# Altium PCB project_6.PcbDoc
Units mm, origin at the board's own origin, x right, y up, seen from the top; angles counter-clockwise.
Board outline 72.69 x 47.42 mm, 2 copper layers (Top Layer, Bottom Layer); 86 components, 65 nets, 283 pads, 74 vias.
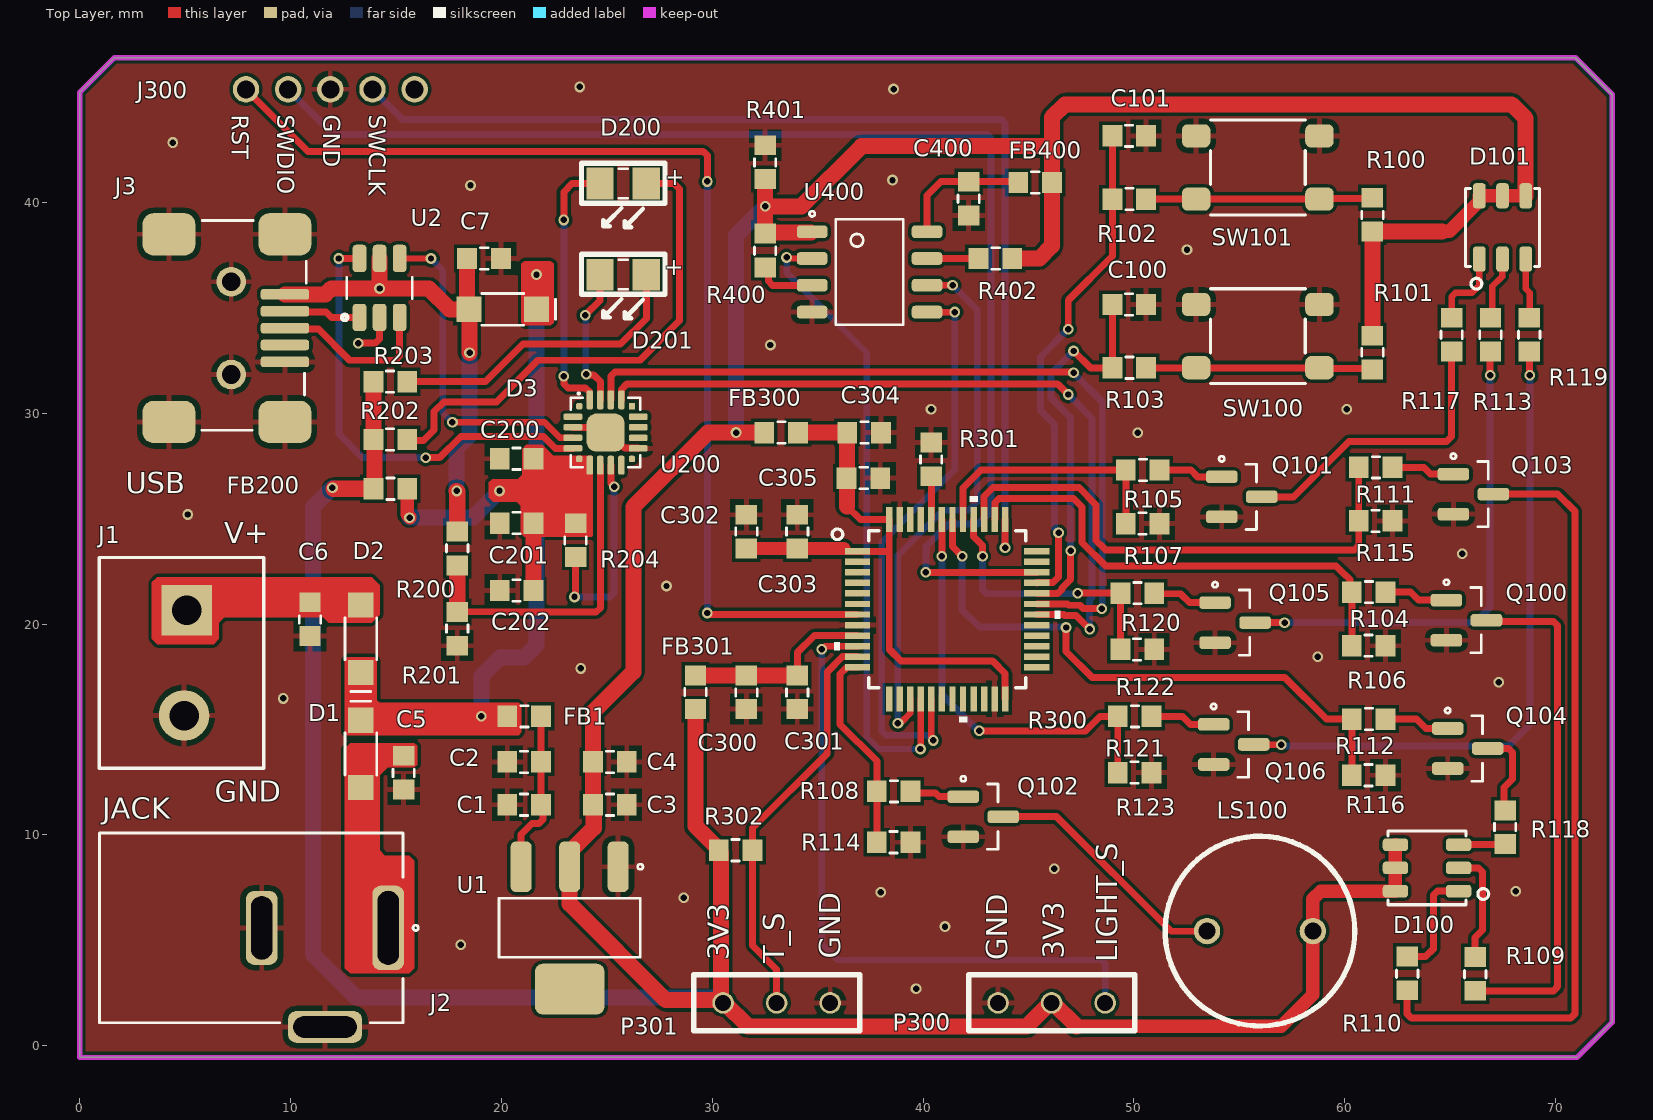
[diagram p0: Top Layer view]
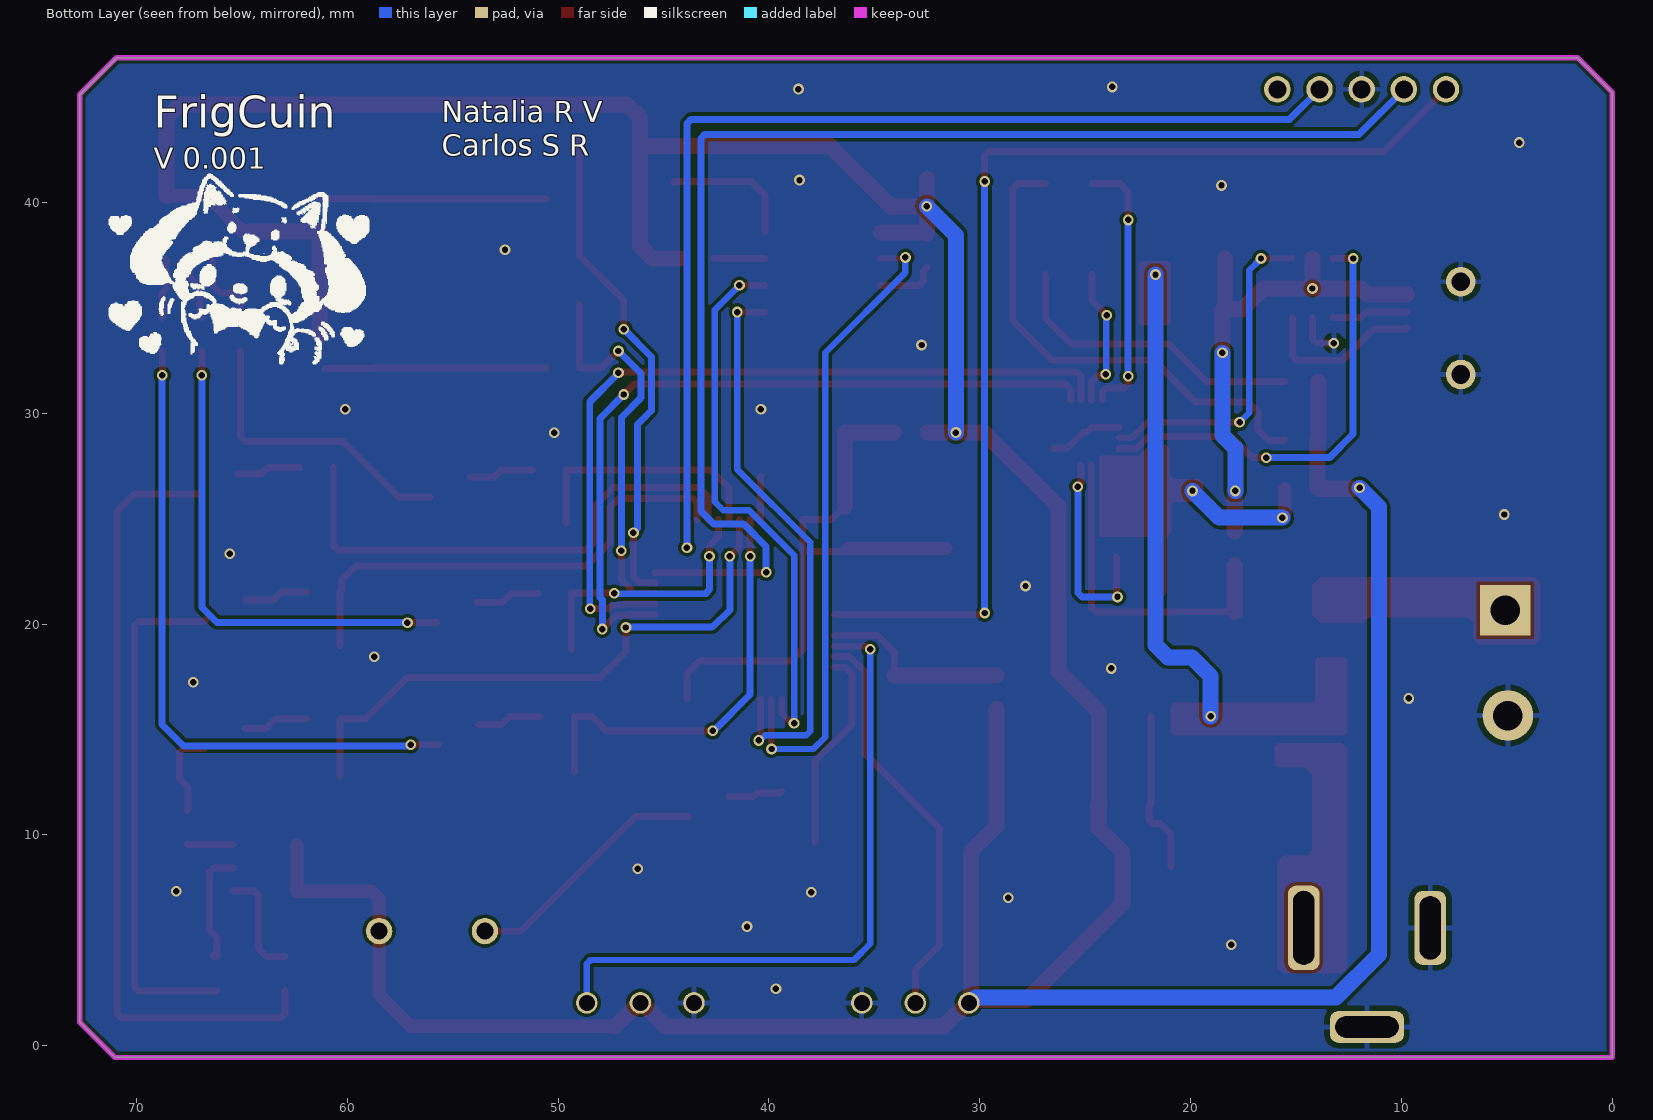
[diagram p1: Bottom Layer view, seen from below]
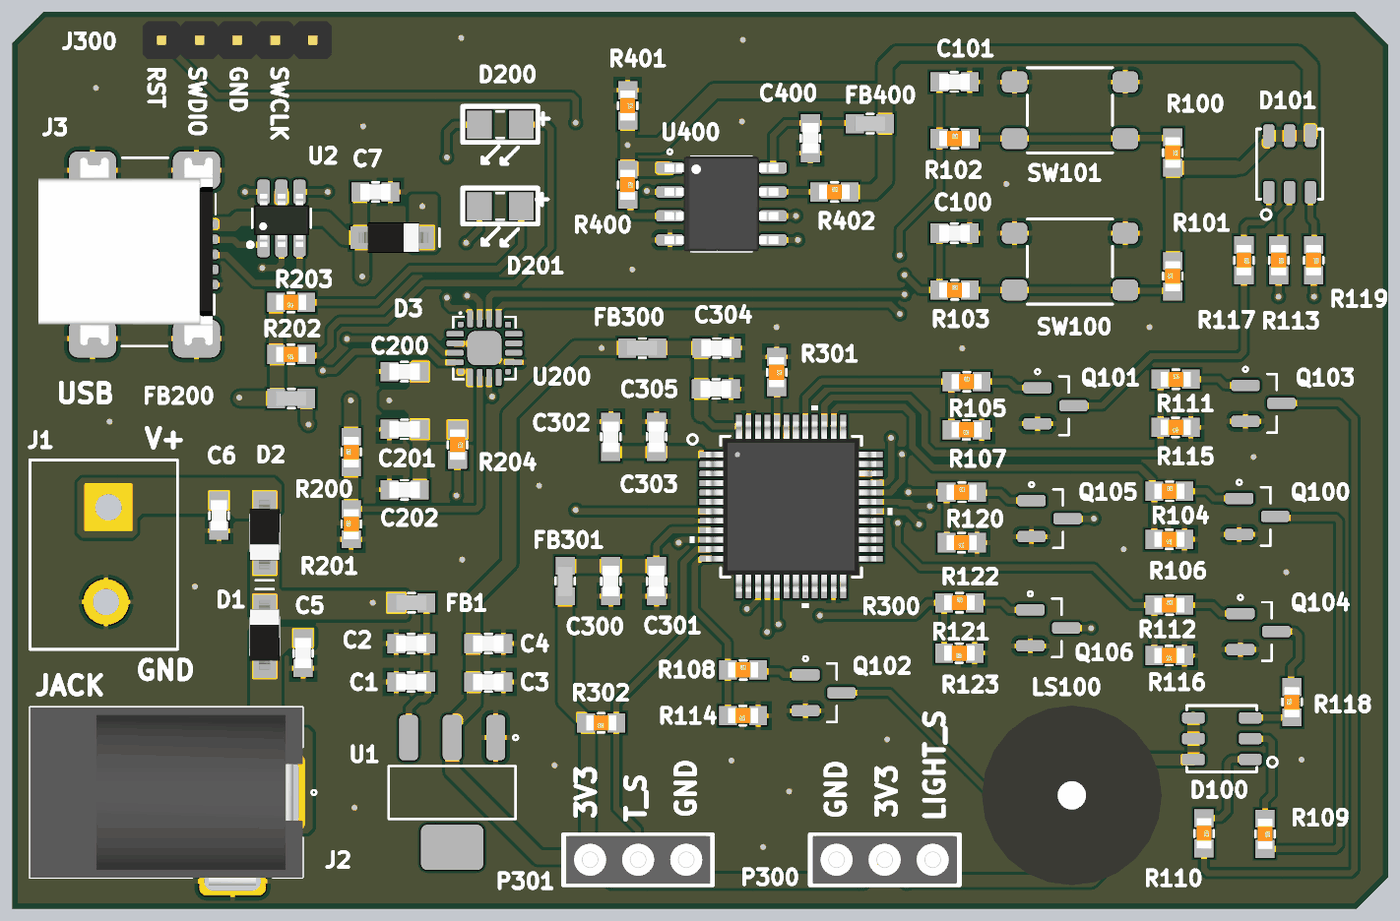
[diagram p2: 3D render of the assembled board from above, using the file's embedded part models]

## Layer stack, top to bottom
Top Solder: solder mask 0.0102, Solder Resist, Dk 3.5
Top Layer: signal copper 0.0356
Dielectric 1: dielectric 0.32, FR-4, Dk 4.8
Bottom Layer: signal copper 0.0356
Bottom Solder: solder mask 0.0102, Solder Resist, Dk 3.5

## Board outline
0,-0.559 71.018,-0.559 72.695,1.118 72.695,45.11 70.942,46.863 1.651,46.863 0,45.212

## Design rules (kind name [scope] priority, off if disabled: settings)
Clearance [All] p1: gap=0.152 ignorepadtopadclearanceinfootprint=TRUE
HoleSize HoleSize_1 [IsVia] p1: absolutevalues=TRUE maxlimit=2.54 minlimit=0.305 maxpercent=80.000 minpercent=20.000
HoleSize [IsPad] p2: absolutevalues=TRUE maxlimit=12.7 minlimit=0.305 maxpercent=80.000 minpercent=20.000
HoleToHoleClearance [All] p1: gap=0.152 allowstackedmicrovias=TRUE
MinimumAnnularRing [IsVia] p1: minimumring=0.102
MinimumSolderMaskSliver [All] p1: minsoldermaskwidth=0.025
PolygonConnect [All] p1: connectstyle=Relief reliefconductorwidth=0.254 reliefentries=4 polygonreliefangle="90 Angle" airgapwidth=0.254
RoomDefinition U_300_MCU [InComponentClass('U_300_MCU')] p1: confinementstyle=ConfineIn formatcopy=TRUE lockcomponents=FALSE outline -5.969,-25.654 158.75,-25.654 158.75,104.267 -5.969,104.267
RoomDefinition U_200_UART_TO_USB [InComponentClass('U_200_UART_TO_USB')] p2: confinementstyle=ConfineIn formatcopy=TRUE lockcomponents=FALSE outline -5.207,-23.495 159.258,-23.495 159.258,104.775 -5.207,104.775
RoomDefinition U_100_H&M_interface [InComponentClass('U_100_H&M_interface')] p3: confinementstyle=ConfineIn formatcopy=TRUE lockcomponents=FALSE outline -10.033,-25.654 154.051,-25.654 154.051,105.918 -10.033,105.918
RoomDefinition U_000_POWER_MODULE [InComponentClass('U_000_POWER_MODULE')] p4: confinementstyle=ConfineIn formatcopy=TRUE lockcomponents=FALSE outline -3.556,-4.953 157.988,-4.953 157.988,104.902 -3.556,104.902
RoutingVias [All] p1: holewidth=0.305 width=0.508 viastyle="Through Hole" minholewidth=0.305 minwidth=0.305 maxholewidth=0.305 maxwidth=0.508
SMDToPlane [All] p1: distance=0
SilkToSilkClearance [All] p1: silktosilkclearance=0.102
SilkToSolderMaskClearance [IsPad] p1: minsilkscreentomaskgap=0.076 clearancetoexposedcopper=TRUE
SolderMaskExpansion [All] p1: expansion=0.076 istentingtop=FALSE soldermaskfromhole=TRUE
Width [All] p1: maxlimit=1.27 minlimit=0.254 preferedwidth=0.33
25 further rules are at their usual default settings.

## Classes and differential pairs
component class U_400_FLAHS_MEMORY: C400 FB400 R400 R401 R402 U400
component class U_300_MCU: C300 C301 C302 C303 C304 C305 FB300 FB301 J300 P300 P301 R300 R301 R302
component class U_200_UART_TO_USB: C200 C201 C202 D200 D201 FB200 R200 R201 R202 R203 R204 U200
component class U_100_H&M_interface: C100 C101 D100 D101 LS100 Q100 Q101 Q102 Q103 Q104 Q105 Q106 R100 R101 R102 R103 R104 R105 R106 R107 R108 R109 R110 R111 R112 R113 R114 R115 R116 R117 R118 R119 R120 R121 R122 R123 SW100 SW101
component class U_000_POWER_MODULE: C1 C2 C3 C4 C5 C6 C7 D1 D2 D3 FB1 J1 J2 J3 U1 U2

## Components (designator, comment, footprint, x,y, rotation, side; value= is the part's Value field where it differs from the comment)
C1 "10uF 10V" 0603_cap 21.082,11.43 r180 top value=10uF
C2 "0.1uF 50V" 0603_cap 21.082,13.462 r180 top value=0.1uF
C3 "10uF 10V" 0603_cap 25.146,11.43 r0 top value=10uF
C4 "0.1uF 50V" 0603_cap 25.146,13.462 r0 top value=0.1uF
C5 "22uF 6V3" 0603_cap 15.367,12.954 r270 top value=22uF
C6 "22uF 6V3" 0603_cap 10.922,20.234 r270 top value=22uF
C7 "22uF 6V3" 0603_cap 19.177,37.338 r0 top value=22uF
C100 "0.1uF 50V" 0603_cap 49.784,35.155 r180 top value=0.1uF
C101 "0.1uF 50V" 0603_cap 49.784,43.156 r180 top value=0.1uF
C200 "10uF 10V" 0603_cap 20.726,27.838 r180 top value=10uF
C201 "0.1uF 50V" 0603_cap 20.726,24.79 r180 top value=0.1uF
C202 "0.1uF 50V" 0603_cap 20.726,21.59 r180 top value=0.1uF
C300 "22uF 6V3" 0603_cap 31.623,16.764 r270 top value=22uF
C301 "0.1uF 50V" 0603_cap 34.036,16.764 r270 top value=0.1uF
C302 "22uF 6V3" 0603_cap 31.623,24.384 r90 top value=22uF
C303 "0.1uF 50V" 0603_cap 34.036,24.384 r90 top value=0.1uF
C304 "0.1uF 50V" 0603_cap 37.211,29.083 r0 top value=0.1uF
C305 "0.1uF 50V" 0603_cap 37.173,26.924 r0 top value=0.1uF
C400 "0.1uF 50V" 0603_cap 42.164,40.183 r270 top value=0.1uF
D1 "40V 1A" SOD_123 13.335,13.843 r270 top
D2 "40V 1A" SOD_123 13.335,19.304 r90 top
D3 "40V 1A" SOD_123 20.066,34.925 r180 top
D100 "RGB" RGB_NS_3.5X3.7 63.906,8.433 r180 top
D101 "RGB" RGB_NS_3.5X3.7 67.488,38.811 r90 top
D200 "2V" 0805_LED 25.781,40.894 r180 top
D201 "2V" 0805_LED 25.781,36.576 r180 top
FB1 "60OHM 2A" 0603_fb 21.082,15.621 r0 top value="60 OHM"
FB200 "60OHM 2A" 0603_fb 14.732,26.416 r0 top value="60 OHM"
FB300 "60OHM 2A" 0603_fb 33.274,29.083 r0 top value="60 OHM"
FB301 "60OHM 2A" 0603_fb 29.21,16.764 r90 top value="60 OHM"
FB400 "60OHM 2A" 0603_fb 45.314,40.945 r0 top
J1 "Connector 2pos" CON_2x1_TH_5MM 4.826,18.161 r270 top
J2 "PWR JACK 2.1mm" CON_POWER_BARREL_2.1MM_3CONN 11.636,5.588 r270 top
J3 "USB Mini B" CON_5x1_SMD_miniUSB_B 6.985,34.036 r270 top
J300 "header_6_pin" header_6_pin 11.887,45.364 r180 top
LS100 "Alarm" Alarm 55.982,5.436 r180 top
P300 "HEAD_FEMALE_3" HEAD_FEMALE_3 46.101,2.032 r180 top
P301 "HEAD_FEMALE_3" HEAD_FEMALE_3 33.058,2.032 r0 top
Q100 "N CH" SOT_23_3 65.776,20.183 r0 top
Q101 "N CH" SOT_23_3 55.118,26.035 r0 top
Q102 "N CH" SOT_23_3 42.86,10.861 r0 top
Q103 "N CH" SOT_23_3 66.106,26.162 r0 top
Q104 "N CH" SOT_23_3 65.837,14.097 r0 top
Q105 "N CH" SOT_23_3 54.803,20.066 r0 top
Q106 "N CH" SOT_23_3 54.737,14.29 r0 top
R100 "1k 1/10W" 0603_res 61.316,39.421 r270 top value=1k
R101 "1k 1/10W" 0603_res 61.316,32.875 r90 top value=1k
R102 "1k 1/10W" 0603_res 49.784,40.156 r0 top value=1k
R103 "1k 1/10W" 0603_res 49.784,32.155 r0 top value=1k
R104 "10k 1/10W" 0603_res 61.138,21.514 r0 top value=10k
R105 "10k 1/10W" 0603_res 50.419,27.305 r0 top value=10k
R106 "10k 1/10W" 0603_res 61.138,18.974 r180 top value=10k
R107 "10k 1/10W" 0603_res 50.419,24.765 r180 top value=10k
R108 "10k 1/10W" 0603_res 38.608,12.065 r0 top value=10k
R109 "330R 1/10W" 0603_res 66.192,3.404 r270 top
R110 "330R 1/10W" 0603_res 62.967,3.429 r270 top
R111 "10k 1/10W" 0603_res 61.468,27.432 r0 top value=10k
R112 "10k 1/10W" 0603_res 61.138,15.494 r0 top value=10k
R113 "330R 1/10W" 0603_res 66.916,33.731 r270 top
R114 "10k 1/10W" 0603_res 38.608,9.652 r180 top value=10k
R115 "10k 1/10W" 0603_res 61.468,24.892 r180 top value=10k
R116 "10k 1/10W" 0603_res 61.138,12.827 r180 top value=10k
R117 "330R 1/10W" 0603_res 65.075,33.731 r270 top
R118 "330R 1/10W" 0603_res 67.615,10.363 r90 top value=100R
R119 "330R 1/10W" 0603_res 68.758,33.731 r270 top value=100R
R120 "10k 1/10W" 0603_res 50.165,21.463 r0 top value=10k
R121 "10k 1/10W" 0603_res 50.038,15.621 r0 top value=10k
R122 "10k 1/10W" 0603_res 50.165,18.796 r180 top value=10k
R123 "10k 1/10W" 0603_res 50.038,12.954 r180 top value=10k
R200 "10k 1/10W" 0603_res 17.907,23.584 r90 top value=10k
R201 "3k3 1/10W" 0603_res 17.907,19.774 r90 top value=3k3
R202 "330R 1/10W" 0603_res 14.732,28.753 r180 top value=330R
R203 "330R 1/10W" 0603_res 14.732,31.496 r180 top value=330R
R204 "10k 1/10W" 0603_res 23.52,23.978 r270 top value=10k
R300 "STM32F030C8T6TR" LQFP48_7x7mm 41.148,20.701 r0 top
R301 "10k 1/10W" 0603_res 40.386,27.813 r270 top value=10k
R302 "10k 1/10W" 0603_res 31.115,9.271 r180 top value=10k
R400 "10k 1/10W" 0603_res 32.512,37.719 r270 top value=10k
R401 "10k 1/10W" 0603_res 32.512,41.91 r270 top value=10k
R402 "10k 1/10W" 0603_res 43.434,37.338 r0 top value=10k
SW100 "Sw" Sw_PUSH_4.5x4.5x5mm 55.88,33.655 r0 top
SW101 "Sw" Sw_PUSH_4.5x4.5x5mm 55.88,41.656 r0 top
U1 "AMS1117-ADJ" SOT_223 23.241,5.588 r270 top
U2 "USBLC6-2SC6" SOT_23_6 14.224,35.941 r90 top
U200 "CP2102N-A02-GQFN20R" WFQFN_20_EP_3X3MM 24.943,29.083 r0 top
U400 "ZD25WQ16BTIGR" SOIC_8_3.9mm 37.465,36.703 r0 top

## Footprints (in the part's own frame and the unit in brackets; to place one, negate y for a bottom-side part, rotate by r counter-clockwise, add the part's x,y. Pads: shape width x height; smd on the part's side, far side on the other; paste and mask are expansions set on the pad)
0603_cap [mil]
  rect 37x40 smd: 1(-31.5,0) 2(31.5,0)
  silkscreen extent -7,-20 8,20, body extent -31,-17 31,17, height 34
0603_fb [mil]
  rect 37x40 smd: 1(-31.5,0) 2(31.5,0)
  silkscreen extent -6,-20 8,20, body extent -32,-16 31,16, height 32
0603_res [mil] "1608 Metric / 20190225 / C-A.Serna.A"
  rect 37x40 smd: 1(-31.5,0) 2(31.5,0)
  silkscreen extent -7,-20 8,20, body extent -31,-16 32,16, height 12
0805_LED [mm]
  rect 1.3x1.5 smd: 1(-1.1,0) 2(1.1,0)
  silkscreen extent -1.98,-0.97 1.98,2.07, body extent -1,-0.62 1,0.63, height 1.1
Alarm [mm]
  round 1.254 hole 0.8: 0(-2.51,0) 1(2.51,0)
  silkscreen extent -4.5,-4.5 4.5,4.5, body extent -4.75,-4.75 4.75,4.75, height 5.1
CON_2x1_TH_5MM [mm]
  rect 2.4x2.4 hole 1.4: 1(-2.5,0.254)
  round 2.4 hole 1.4: 2(2.5,0.127)
  silkscreen extent -5,-3.9 5,3.9, body extent -5,-3.9 5,3.9, height 10.2
CON_5x1_SMD_miniUSB_B [mm] "20190328 / V-A.Patino"
  rrect50% 2x2.5 smd: 0(-4.45,2.75) 0(-4.45,-2.75) 0(4.45,2.75) 0(4.45,-2.75)
  round 1.4 hole 0.889: 0(-2.2,0.2) 0(2.2,0.2)
  rrect50% 0.5x2.3 smd: 1(-1.6,2.75) 2(-0.8,2.75) 3(0,2.75) 4(0.8,2.75) 5(1.6,2.75)
  silkscreen extent -5.11,-1.2 4.85,3.76, body extent -5.1,-5.6 4.8,3.65, height 4
CON_POWER_BARREL_2.1MM_3CONN [mm]
  rrect50% 4x1.5 hole 1.016 slot 3.5 at 0 deg: 1(0,3)
  rrect50% 3.5x1.5 hole 1.016 slot 3 at 0 deg: 2(0,-3)
  rrect50% 1.5x3.5 hole 1.016 slot 3 at 90 deg: 3(4.7,0)
  silkscreen extent -4.5,-10.7 4.5,4.43, body extent -4.5,-10.7 4.9,3.7, height 11
HEAD_FEMALE_3 [mm]
  round 1.02 hole 0.762: 1(-2.54,0) 2(0,0)
  round 1.02 hole 0.762 unplated: 3(2.54,0)
  silkscreen extent -3.94,-1.33 3.94,1.33, body extent -3.8,-1.27 3.82,1.27, height 6.52
header_6_pin [mm]
  round 1.254 hole 0.85: 1(-4,0) 2(-2,0) 3(0,0) 4(2,0) 5(4,0)
  body extent -5,-1 5,1, height 5
LQFP48_7x7mm [mm]
  rect 1.194x0.305 smd paste+0: 1(-4.25,2.75) 2(-4.25,2.25) 3(-4.25,1.75) 4(-4.25,1.25) 5(-4.25,0.75) 6(-4.25,0.25) 7(-4.25,-0.25) 8(-4.25,-0.75) 9(-4.25,-1.25) 10(-4.25,-1.75) 11(-4.25,-2.25) 12(-4.25,-2.75) 25(4.25,-2.75) 26(4.25,-2.25) 27(4.25,-1.75) 28(4.25,-1.25) 29(4.25,-0.75) 30(4.25,-0.25) 31(4.25,0.25) 32(4.25,0.75) 33(4.25,1.25) 34(4.25,1.75) 35(4.25,2.25) 36(4.25,2.75)
  rect 0.305x1.194 smd paste+0: 13(-2.75,-4.25) 14(-2.25,-4.25) 15(-1.75,-4.25) 16(-1.25,-4.25) 17(-0.75,-4.25) 18(-0.25,-4.25) 19(0.25,-4.25) 20(0.75,-4.25) 21(1.25,-4.25) 22(1.75,-4.25) 23(2.25,-4.25) 24(2.75,-4.25) 37(2.75,4.25) 38(2.25,4.25) 39(1.75,4.25) 40(1.25,4.25) 41(0.75,4.25) 42(0.25,4.25) 43(-0.25,4.25) 44(-0.75,4.25) 45(-1.25,4.25) 46(-1.75,4.25) 47(-2.25,4.25) 48(-2.75,4.25)
  silkscreen extent -5.46,-5.35 5.35,5.35, body extent -4.5,-4.5 4.5,4.5, height 1.6
RGB_NS_3.5X3.7 [mm] "20220901/V-A.Patino"
  rrect50% 1.2x0.6 smd: 1(-1.5,1.1) 2(-1.5,0) 3(-1.5,-1.1) 4(1.5,-1.1) 5(1.5,0) 6(1.5,1.1)
  silkscreen extent -2.93,-1.75 1.85,1.75, body extent -1.85,-1.74 1.85,1.75, height 1
SOD_123 [mm] "/ 20191030 / V-A.Patino"
  rect 1.2x1.2 smd: 1(-1.6,0) 2(1.6,0)
  silkscreen extent -2.5,-0.75 1,0.75, body extent -1.93,-0.8 1.77,0.8, height 1.28
SOIC_8_3.9mm [mm]
  rrect50% 1.45x0.6 smd: 1(-2.725,1.905) 2(-2.725,0.635) 3(-2.725,-0.635) 4(-2.725,-1.905) 5(2.725,-1.905) 6(2.725,-0.635) 7(2.725,0.635) 8(2.725,1.905)
  silkscreen extent -2.85,-2.5 1.6,2.88, body extent -3.01,-2.5 3.01,2.5, height 1.73
SOT_23_3 [mm] "TO-236-3, SC-59/ 20220901 / V-A.Patino"
  rrect50% 1.5x0.6 smd: 1(-0.95,0.95) 2(-0.95,-0.95) 3(0.95,0)
  silkscreen extent -1.07,-1.55 0.7,1.92, body extent -0.7,-1.52 0.7,1.53, height 1.12
SOT_23_6 [mm] "/ 20190225 / V-A.Patino"
  rrect50% 1.3x0.65 smd: 1(-1.4,0.95) 2(-1.4,0) 3(-1.4,-0.95) 4(1.4,-0.95) 5(1.4,0) 6(1.4,0.95)
  silkscreen extent -1.52,-1.55 0.5,1.78, body extent -1.5,-1.45 1.3,1.45, height 1.45
SOT_223 [mm] "TO-261-4, TO-261AA / 20220901/ V-A.Patino"
  rrect50% 2.4x1 smd: 1(-2.9,2.3) 2(-2.9,0) 3(-2.9,-2.3)
  rrect30% 2.4x3.3 smd: 4(2.9,0)
  silkscreen extent -3.02,-3.35 1.4,3.48, body extent -1.86,-3.35 1.86,3.35, height 1.8
Sw_PUSH_4.5x4.5x5mm [mm]
  rrect50% 1.35x1.1 smd: 1(-2.925,1.5) 1(2.925,1.5) 2(-2.925,-1.5) 2(2.925,-1.5)
  silkscreen extent -2.25,-2.25 2.25,2.25, body extent -2.25,-2.25 2.25,2.25, height 5
WFQFN_20_EP_3X3MM [mm] "QFN_20/ 20210809/ V-A.Patino"
  rrect50% 0.3x0.3 smd: 1(-1.25,1.25) 6(-1.25,-1.25) 11(1.25,-1.25)
  rrect50% 0.9x0.3 smd: 2(-1.55,0.75) 3(-1.55,0.25) 4(-1.55,-0.25) 5(-1.55,-0.75) 12(1.55,-0.75) 13(1.55,-0.25) 14(1.55,0.25) 15(1.55,0.75)
  rrect50% 0.3x0.9 smd: 7(-0.75,-1.55) 8(-0.25,-1.55) 9(0.25,-1.55) 10(0.75,-1.55) 17(0.75,1.55) 18(0.25,1.55) 19(-0.25,1.55) 20(-0.75,1.55)
  rect 0.3x0.3 smd: 16(1.25,1.25)
  rrect50% 1.8x1.8 smd: 21(0,0)
  silkscreen extent -1.65,-1.65 1.65,1.9, body extent -1.5,-1.5 1.5,1.5, height 0.8

## Part data
C1 C3 C200: library part Cap_10uF_0603_10V, "10V 10uF X5R ±10% 0603 Multilayer Ceramic Capacitors MLCC - SMD/SMT ROHS", Manufacturer=CCTC, Manufacturer Part Number=TCC0603X5R106K100CT, Supplier Part Number 1=C380314, ComponentLink1Description=LCSC, ComponentLink1URL=https://www.lcsc.com/product-detail/Multilayer-Ceramic-Capacitors-MLCC-SMD-SMT_CCTC-TCC0603X5R106K100CT_C380314.html, Supplier 1=LCSC
C2 C4 C100 C101 C201 C202 C301 C303 C304 C305 C400: library part Cap_0.1uF_0603_50V, "50V 100nF Y5V -20%~+80% 0603 Multilayer Ceramic Capacitors MLCC - SMD/SMT ROHS", Manufacturer="Walsin Tech Corp", Manufacturer Part Number=0603F104Z500CT, Supplier Part Number 1=C83060, ComponentLink1Description=LCSC, ComponentLink1URL=https://www.lcsc.com/product-detail/Multilayer-Ceramic-Capacitors-MLCC-SMD-SMT_Walsin-Tech-Corp-0603F104Z500CT_C83060.html, Supplier 1=LCSC
C5 C6 C7 C300 C302: library part Cap_22uF_0805_6V3, "6.3V 22uF X5R ±20% 0805 Multilayer Ceramic Capacitors MLCC - SMD/SMT ROHS", Manufacturer="Samsung Electro-Mechanics", Manufacturer Part Number=CL21A226MQQNNNE, Supplier Part Number 1=C5674, ComponentLink1Description=LCSC, ComponentLink1URL=https://www.lcsc.com/product-detail/Multilayer-Ceramic-Capacitors-MLCC-SMD-SMT_Samsung-Electro-Mechanics-CL21A226MQQNNNE_C5674.html, Supplier 1=LCSC
D1 D2 D3: library part D_Schottky_40V_1A_SOD_123F, "DIODE SCHOTTKY 40V 1A SOD123F", Manufacturer="Shanghai Prisemi Elec", Manufacturer Part Number=PSBD1DF40V1H, Supplier Part Number 1=C110730, ComponentLink1Description=LCSC, ComponentLink1URL=https://www.lcsc.com/product-detail/Switching-Diode_Shanghai-Prisemi-Elec-PSBD1DF40V1H_C110730.html, Supplier 1=LCSC
D100 D101: library part LED_RGB_3535_SMD, "-30℃~+85℃ RGB 110° 3535(mm) Light Emitting Diodes (LED) ROHS", Manufacturer="Foshan NationStar Optoelectronics", Manufacturer Part Number=RS-3535MWAM, Supplier Part Number 1=C842778, ComponentLink1Description=LCSC, ComponentLink1URL=https://www.lcsc.com/product-detail/Light-Emitting-Diodes-LED_Foshan-NationStar-Optoelectronics-RS-3535MWAM_C842778.html, Supplier 1=LCSC
D200 D201: library part LED_0805_RED, "LED RED CLEAR 0805 SMD", Manufacturer=XINGLIGHT, Manufacturer Part Number=XL-2012SURC, Supplier Part Number 1=C965812, ComponentLink1Description=LCSC, ComponentLink1URL=https://www.lcsc.com/product-detail/Light-Emitting-Diodes-LED_XINGLIGHT-XL-2012SURC_C965812.html, Supplier 1=LCSC
FB1 FB200 FB300 FB301 FB400: library part FB_60_0603_2A, "2A 1 100mΩ 60Ω@100MHz ±25% 0603 Ferrite Beads ROHS", Manufacturer=TAI-TECH, Manufacturer Part Number=HCB1608KF-600T20, Supplier Part Number 1=C369516, ComponentLink1Description=LCSC, ComponentLink1URL=https://www.lcsc.com/product-detail/Ferrite-Beads_TAI-TECH-HCB1608KF-600T20_C369516.html, Supplier 1=LCSC
J1: library part Con_2x1_TH_5mm, "2POS 5MM", Manufacturer=JILN, Manufacturer Part Number=JL126-50002G01, Supplier Part Number 1=C394556, ComponentLink1Description=Digi-Key, ComponentLink1URL=https://www.lcsc.com/product-detail/Screw-terminal_JILN-JL126-50002G01_C394556.html, Supplier 1=LCSC
J2: library part Con_Power_Jack_2.1mm_3pins, "CONN PWR JACK 2X5.5MM SOLDER", Manufacturer=HCTL, Manufacturer Part Number=HC-DC-005-2.0T, Supplier Part Number 1=C3010533, ComponentLink1Description=LCSC, ComponentLink1URL=https://www.lcsc.com/product-detail/AC-DC-Power-Connectors_HCTL-HC-DC-005-2-0T_C3010533.html, Supplier 1=LCSC
J3: library part Con_Mini_USB_B, "CONN RCPT USB2.0 MINI B SMD R/A", Manufacturer="EDAC Inc.", Manufacturer Part Number=KH-MINI-SMT-5P-Cu, Supplier Part Number 1=C2688795, ComponentLink1Description=LCSC, ComponentLink1URL=https://datasheet.lcsc.com/lcsc/2106070035_Shenzhen-Kinghelm-Elec-KH-MINI-SMT-5P-Cu_C2688795.pdf, Supplier 1=LCSC
J300: "Straight Square Pins 2mm 3.9mm -40℃~+105℃ 2.8mm 5 2mm 单排 Black Brass 1x5P Plugin,P=2mm Pin Headers ROHS", Manufacturer=XFCN, Manufacturer Part Number=PZ200V-11-05P, Supplier Part Number=C541859, ComponentLink1Description=LCSC, ComponentLink1URL=https://www.lcsc.com/product-detail/span-style-background-color-ff0-Pin-span-span-style-background-color-ff0-Headers-span_XFCN-PZ200V-11-05P_C541859.html, Supplier=LCSC, Usage=Straight
LS100: "Buzzers Indicator, Internally Driven Piezo 12 V 300mA 2.5kHz 100dB @ 12V, 100cm Panel Mount, Flange Wire Leads", Manufacture="Mallory Sonalert Products Inc.", Manufacture Part Number=PS-583Q, Supplier Part Number=PS-583Q-ND, ComponentLink1Description=Datasheet, ComponentLink1URL=https://www.digikey.com/en/products/detail/mallory-sonalert-products-inc/PS-583Q/1957914?s=N4IgTCBcDaIAoGUC0BWAHAZgIogLoF8g, Supplier=Digi-key, Usage="Trough hole"
P300 P301: "2.54mm 单排 Gold Straight 1x3P 3 Plugin,P=2.54mm Female Headers ROHS", Manufacture=MINTRON, Manufacture Part Number=MTF185-103SY1, Supplier Part Number=C358717, ComponentLink1Description=datasheet, ComponentLink1URL=https://datasheet.lcsc.com/lcsc/1912111437_MINTRON-MTF185-103SY1_C358717.pdf, Supplier=LCSC, Usage=Straight
Q100 Q101 Q102 Q103 Q104 Q105 Q106: library part Q_NFET_20V_3.2A_SOT23, "MOSFET N-CH 20V SOT23", Manufacturer=Doeshare, Manufacturer Part Number=DN2302S, Supplier Part Number 1=C2931750, ComponentLink1Description=LCSC, ComponentLink1URL=https://www.lcsc.com/product-detail/MOSFETs_Doeshare-DN2302S_C2931750.html, Supplier 1=LCSC
R100 R101 R102 R103: library part Res_1k_0603_1/10W, "RES SMD 1k OHM 5% 1/10W 0603", Manufacturer=FOJAN, Manufacturer Part Number="FRC0603J102 TS", Supplier Part Number 1=C2907113, ComponentLink1Description=LCSC, ComponentLink1URL=https://www.lcsc.com/product-detail/Chip-Resistor-Surface-Mount_FOJAN-FRC0603J102-TS_C2907113.html, Supplier 1=LCSC
R104 R105 R106 R107 R108 R111 R112 R114 R115 R116 R120 R121 R122 R123 R200 R204 R301 R302 R400 R401 R402: library part Res_10k_0603_1/10W, "RES SMD 10k OHM 5% 1/10W 0603", Manufacturer=FOJAN, Manufacturer Part Number=FRC0603J103TS, Supplier Part Number 1=C2930027, ComponentLink1Description=LCSC, ComponentLink1URL=https://www.lcsc.com/product-detail/Chip-Resistor-Surface-Mount_FOJAN-FRC0603J103TS_C2930027.html, Supplier 1=LCSC
R109 R110 R113 R117: library part RES_130R_0603, "100mW Thin Film Resistor ±0.1% 130Ω 0603 Chip Resistor - Surface Mount ROHS", Manufacture="resistor today", Manufacture Part Number=PTFR0603B130RP9, Suplier Part Number=C351683, ComponentLink1Description=LCSC, ComponentLink1URL=https://www.lcsc.com/product-detail/Chip-span-style-background-color-ff0-Resistor-span-Surface-Mount_span-style-background-color-ff0-Resistor-span-Today-PTFR0603B130RP9_C351683.html, Supplier=lcsc, Usage=0603
R118 R119: library part Res_100R_0603_1/10W, "RES SMD 100R OHM 5% 1/10W 0603", Manufacturer=FOJAN, Manufacturer Part Number="FRC0603J101 TS", Supplier Part Number 1=C2907089, ComponentLink1Description=LCSC, ComponentLink1URL=https://www.lcsc.com/product-detail/Chip-Resistor-Surface-Mount_FOJAN-FRC0603J101-TS_C2907089.html, Supplier 1=LCSC
R201: library part Res_3k3_0603_1/10W, "RES SMD 3k3 OHM 5% 1/10W 0603", Manufacturer=FOJAN, Manufacturer Part Number="FRC0603J332 TS", Supplier Part Number 1=C2907140, ComponentLink1Description=LCSC, ComponentLink1URL=https://www.lcsc.com/product-detail/Chip-Resistor-Surface-Mount_FOJAN-FRC0603J332-TS_C2907140.html, Supplier 1=LCSC
R202 R203: library part Res_330R_0603_1/10W, "RES SMD 330R OHM 5% 1/10W 0603", Manufacturer=FOJAN, Manufacturer Part Number="FRC0603J331 TS", Supplier Part Number 1=C2907152, ComponentLink1Description=LCSC, ComponentLink1URL=https://www.lcsc.com/product-detail/Chip-Resistor-Surface-Mount_FOJAN-FRC0603J331-TS_C2907152.html, Supplier 1=LCSC
R300: library part IC_STM32F030C8T6TR_LQFP48_7x7MM, "IC MCU 32BIT 64KB FLASH 48LQFP", Manufacturer=STMicroelectronics, Supplier Part Number 1=C23922, ComponentLink1Description=LCSC, ComponentLink1URL=https://www.lcsc.com/product-detail/ST-Microelectronics_STMicroelectronics-STM32F030C8T6_C23922.html, Manufacturer Part Number=STM32F030C8T6TR, Supplier 1=LCSC
SW100 SW101: library part Sw_PUSH_4.5x4.5x5.0xmm, "SWITCH TACTILE SPST-NO 0.05A 12V", Manufacturer=BZCN, Manufacturer Part Number=TSC015A05026A, Supplier Part Number 1=C2888509, ComponentLink1Description=LCSC, ComponentLink1URL=https://www.lcsc.com/product-detail/Tactile-Switches_BZCN-TSC015A05026A_C2888509.html, Last modified by=N-A.Potosi, Last modified date=20190222, Supplier 1=LCSC
U1: library part LDO_3V3_1A, "1A 70dB@(120Hz) 5mA 1.2V@1A Adjustable 1.2V~20V Positive 1 20V Output Adjustable SOT-223-3L Linear Voltage Regulators (LDO) ROHS", Manufacturer="WPMtek(Wei Pan Microelectronics)", Supplier Part Number=C2688238, ComponentLink1Description=LCSC, ComponentLink1URL=https://www.lcsc.com/product-detail/Linear-Voltage-Regulators-LDO_WPMtek-Wei-Pan-Microelectronics-AMS1117-ADJ_C2688238.html, Manufacturer Part Number=AMS1117-ADJ, Supplier=LCSC
U2: library part TVS_5.25V_2CH_SOT_23_6, "TVS DIODE 5.25V 17V SOT23-6", Manufacturer=STMicroelectronics, Supplier Part Number 1=C7519, ComponentLink1Description=LCSC, ComponentLink1URL=https://www.lcsc.com/product-detail/ESD-Protection-Devices_STMicroelectronics-USBLC6-2SC6_C7519.html, Manufacturer Part Number=USBLC6-2SC6, Supplier 1=LCSC
U200: library part IC_SGL_USB2UART-BRIDGE_20QFN, "IC USB TO UART BRIDGE QFN20", Manufacturer="Silicon Labs", Supplier Part Number 1=C969913, ComponentLink1Description=LCSC, ComponentLink1URL=https://www.lcsc.com/product-detail/USB-ICs_SILICON-LABS-CP2102N-A02-GQFN20R_C969913.html, Manufacturer Part Number=CP2102N-A02-GQFN20R, Supplier 1=LCSC
U400: library part IC_FLASH_ZD25WQ16BTIGR_8SOP, "IC FLASH 16M SPI 85MHZ 8SOP", Manufacturer=Zetta, Supplier Part Number 1=C2896790, ComponentLink1Description=LCSC, ComponentLink1URL=https://www.lcsc.com/product-detail/NOR-FLASH_Zetta-ZD25WQ16BTIGR_C2896790.html, Manufacturer Part Number=ZD25WQ16BTIGR, Supplier 1=LCSC

## Via types
v1: diameter 0.508, hole 0.305, Top Layer to Bottom Layer, tented top, 74 vias

## Nets (pads, with @x,y where several pads share a name; then routed paths per layer and width w, separated by ;. In a path a pad name is that pad's centre, name@x,y a point inside that pad or via, vN(x,y) a via of type N, cw(c..) or ccw(c..) an arc to the next point about the centre after c; other vN are vias at no path point)
3V3: C3.1 C4.1 D100.4 D100.5 D100.6 D101.4 D101.5 D101.6 FB200.1 FB300.1 FB301.1 FB400.2 LS100.0 P300.2 P301.1 R100.2 R101.2 R202.2 R203.2 R302.2 R400.1 R401.2 R402.2 U1.2 U400.1 | length 220.8
  Top Layer w0.33: R400.1 R400.1@32.556,38.564 ; U400.1@34.696,38.564 U400.1
  Top Layer w0.635: 47.282,0.914 56.998,0.914 58.492,2.408 LS100.0 58.492,6.961 58.864,7.333 D100.6 D100.5 D100.4 ; 64.63,38.621 64.962,38.621 66.388,40.046 D101.6 D101.5 D101.4
  Top Layer w0.762: v1@12.04,26.416 FB200.1 ; R202.2 R203.2 ; FB200.1@13.983,26.467 R202.2@13.983,28.702 ; FB301.1 29.21,10.414 30.315,9.309 R302.2 30.416,9.169 P301.1@30.416,2.134 ; FB300.1 v1(31.134,29.083) 29.794,29.083 26.264,25.552 26.264,17.729 24.346,15.811 C4.1 C3.1 24.384,11.392 24.384,10.331 23.241,9.188 U1.2 23.241,6.731 27.808,2.164 30.386,2.164 P301.1@30.416,2.134 ; R400.1 v1(32.512,39.814) ; R401.2 v1(32.512,39.814) ; R400.1@32.556,38.564 U400.1@34.696,38.564 ; R402.2 45.517,37.338 46.114,37.935 FB400.2 46.114,42.672 ; 47.282,0.914 46.165,2.032 P300.2 46.037,2.032 44.92,0.914 31.7,0.914 30.582,2.032 P301.1 P301.1@30.416,2.134 ; R101.2 R100.2 64.63,38.621 ; D101.4 68.588,43.985 67.92,44.653 46.736,44.653 46.114,44.031 46.114,42.672 ; v1(32.512,39.814) 34.227,39.814 37.084,42.672 46.114,42.672
  Bottom Layer w0.762: v1@11.982,26.46 11.075,25.553 11.075,4.318 13.107,2.286 30.194,2.286 30.448,2.032 P301.1 ; v1(31.134,29.083) 31.134,38.437 v1(32.512,39.814)
  other v1: 11.989,26.467
ALARM: LS100.1 Q102.3 | length 11.9
  Top Layer w0.305: 51.74,5.461 51.765,5.436 LS100.1
  Top Layer w0.33: Q102.3 46.34,10.861 51.74,5.461
B1a: Q105.3 R113.2 | length 23.6
  Top Layer w0.33: Q105.3 v1(57.15,20.066) ; v1(66.904,31.801) 66.904,32.918 R113.2
  Bottom Layer w0.33: v1(57.15,20.066) 66.192,20.066 66.904,20.777 v1(66.904,31.801)
B2a: Q106.3 R119.2 | length 31.2
  Top Layer w0.33: Q106.3 55.702,14.275 v1(56.998,14.275) ; R119.2 68.758,31.826 v1(68.783,31.801)
  Bottom Layer w0.33: v1(56.998,14.275) 57.048,14.224 67.767,14.224 68.783,15.24 v1(68.783,31.801)
G1a: Q103.3 R110.2 | length 37.3
  Top Layer w0.33: R110.2 62.967,1.514 63.16,1.321 70.723,1.321 70.917,1.514 70.917,25.349 70.104,26.162 Q103.3
G2a: Q104.3 R118.2 | length 4.2
  Top Layer w0.33: Q104.3 67.777,14.097 67.97,13.904 67.97,12.649 67.564,12.243 67.564,11.214 R118.2
GND: C1.2 C2.2 C3.2 C4.2 C5.2 C6.2 C7.2 C100.1 C101.1 C200.2 C201.2 C202.2 C300.2 C301.2 C302.2 C303.2 C304.2 C305.2 C400.2 J1.2 J2.2 J2.3 J3.0 J3.5 J300.3 P300.3 P301.3 Q100.2 Q101.2 Q102.2 Q103.2 Q104.2 Q105.2 Q106.2 R106.1 R107.1 R114.1 R115.1 R116.1 R122.1 R123.1 R201.1 R300.8 R300.23 R300.47 R301.1 R401.1 SW100.1 SW101.1 U1.1 U2.2 U200.3 U200.12 U200.21 U400.4 | length 5.6
  Top Layer w0.33: v1(13.208,33.325) 14.031,33.325 14.224,33.518 U2.2 ; U200.3 23.408,29.318 24.708,29.318 U200.21 25.097,29.083 25.832,28.348 26.478,28.348 U200.12
  other v1: 39.671,2.705 18.081,4.787 41.043,5.651 28.647,7.023 37.995,7.277 68.119,7.327 46.224,8.394 9.648,16.471 67.306,17.233 23.771,17.894 58.721,18.453 27.835,21.805 65.579,23.329 5.131,25.197 50.187,29.07 40.382,30.187 60.093,30.187 32.762,33.235 52.523,37.757 18.538,40.805 38.553,41.059 4.416,42.837 38.604,45.377 23.72,45.478
LIGHT_S: P300.1 R300.10 | length 31.4
  Top Layer w0.305: v1(35.202,18.799) 35.209,18.799 35.361,18.951 R300.10
  Bottom Layer w0.305: v1(35.202,18.799) 35.202,4.829 35.966,4.064 48.462,4.064 48.641,3.885 P300.1
NetC1_1: C1.1 C2.1 FB1.2 U1.3 | length 7.8
  Top Layer w0.33: U1.3 20.941,10.019 21.463,10.541 21.778,10.541 21.971,10.734 21.971,11.341 C1.1 C2.1 FB1.2
NetC100_2: C100.2 R103.1 R300.32 | length 18.7
  Top Layer w0.33: R300.32 46.39,21.451 46.584,21.644 46.584,21.7 47.003,22.119 v1(47.003,23.47) ; v1(47.142,32.952) 47.94,32.155 R103.1 C100.2
  Bottom Layer w0.33: v1(47.003,23.47) 47.003,29.807 46.076,30.734 46.076,31.885 v1(47.142,32.952)
NetC101_2: C101.2 R102.1 R300.33 | length 23.8
  Top Layer w0.33: R300.33 45.411,21.964 46.165,21.964 46.431,22.23 v1(46.431,24.333) ; v1(46.888,33.985) 46.888,35.357 48.984,37.452 R102.1 C101.2
  Bottom Layer w0.33: v1(46.431,24.333) 46.228,24.536 46.228,29.464 45.568,30.124 45.568,32.664 v1(46.888,33.985)
NetC400_1: C400.1 FB400.1 U400.8 | length 6.3
  Top Layer w0.33: U400.8 40.19,40.317 40.856,40.983 C400.1 44.475,40.983 FB400.1
NetD100_1: D100.1 R110.1 | length 5.2
  Top Layer w0.33: R110.1 63.843,4.229 64.211,4.597 64.211,7.139 64.405,7.333 D100.1
NetD100_2: D100.2 R109.1 | length 5.5
  Top Layer w0.33: D100.2 66.355,8.433 66.548,8.239 66.548,5.486 66.192,5.131 R109.1 ; R109.1@66.319,4.204 R109.1@66.396,4.28
NetD100_3: D100.3 R118.1 | length 2.2
  Top Layer w0.33: D100.3 65.422,9.548 67.6,9.548 R118.1
NetD101_1: D101.1 R117.1 | length 3.8
  Top Layer w0.305: R117.1 65.075,35.534 65.253,35.712 66.04,35.712 66.388,36.06 D101.1
NetD101_2: D101.2 R113.1 | length 3
  Top Layer w0.305: R113.1 67.005,34.62 67.005,36.017 67.469,36.481 67.469,37.292 D101.2
NetD101_3: D101.3 R119.1 | length 2.9
  Top Layer w0.305: D101.3 68.588,35.908 68.783,35.712 68.783,34.557 R119.1
NetD200_1: D200.1 R202.1 | length 23.7
  Top Layer w0.33: R202.1 15.586,28.699 16.304,28.699 16.815,29.21 16.815,30.074 17.272,30.531 19.761,30.531 21.742,32.512 26.568,32.512 28.448,34.392 28.448,40.64 28.194,40.894 D200.1
NetD201_1: D201.1 R203.1 | length 14.7
  Top Layer w0.33: R203.1 19.244,31.496 21.022,33.274 25.654,33.274 26.881,34.501 D201.1
NetJ3_2: J3.2 U2.1 | length 3.7
  Top Layer w0.33: J3.2 9.773,34.798 11.684,34.798 11.938,34.544 12.192,34.544 12.195,34.541 U2.1
NetJ3_3: J3.3 U2.3 | length 8
  Top Layer w0.33: J3.3 9.774,33.997 11.317,33.997 12.802,32.512 14.981,32.512 15.174,32.705 U2.3
NetQ100_1: Q100.1 R104.2 | length 3
  Top Layer w0.33: R104.2 63.119,21.514 63.5,21.133 Q100.1
NetQ101_1: Q101.1 R105.2 | length 3.1
  Top Layer w0.33: R105.2 52.705,27.305 53.025,26.985 Q101.1
NetQ102_1: Q102.1 R108.2 | length 2.6
  Top Layer w0.33: R108.2 39.484,11.989 40.589,11.989 40.767,11.811 Q102.1
NetQ103_1: Q103.1 R111.2 | length 3
  Top Layer w0.33: R111.2 63.754,27.432 64.074,27.112 Q103.1
NetQ104_1: Q104.1 R112.2 | length 3.1
  Top Layer w0.33: R112.2 63.41,15.494 63.857,15.047 Q104.1
NetQ105_1: Q105.1 R120.2 | length 3.1
  Top Layer w0.33: R120.2 50.99,21.438 52.222,21.438 52.644,21.016 Q105.1
NetQ106_1: Q106.1 R121.2 | length 3.1
  Top Layer w0.33: R121.2 52.299,15.621 52.68,15.24 Q106.1
NetR100_1: R100.1 R102.2 SW101.2 | length 10.8
  Top Layer w0.33: R102.2 52.955,40.156 58.805,40.156 58.837,40.188 61.283,40.188 R100.1
NetR101_1: R101.1 R103.2 SW100.2 | length 10.5
  Top Layer w0.33: R103.2 52.955,32.155 58.805,32.155 58.845,32.115 61.047,32.115 R101.1@61.087,32.075
NetR104_1: R104.1 R106.2 R300.38 | length 23.5
  Top Layer w0.33: R300.38 43.411,24.964 43.411,25.765 43.604,25.959 47.142,25.959 47.549,25.552 47.549,23.876 48.666,22.758 59.588,22.758 60.046,22.301 60.055,22.301 60.249,22.108 60.249,21.603 R104.1 R106.2
NetR105_1: R105.1 R107.2 R300.41 | length 12.1
  Top Layer w0.33: R300.41 41.898,26.455 42.748,27.305 R105.1 R107.2
NetR108_1: R108.1 R114.2 R300.12 | length 9.7
  Top Layer w0.33: R300.12 36.391,17.951 36.068,17.628 36.068,15.24 37.808,13.5 R108.1 R114.2
NetR111_1: R111.1 R115.2 R300.39 | length 25
  Top Layer w0.33: R300.39 42.898,26.043 43.322,26.467 47.396,26.467 48.209,25.654 48.209,23.968 48.403,23.774 48.412,23.774 48.666,23.52 60.474,23.52 60.668,23.714 R115.2 R111.1
NetR112_1: R112.1 R116.2 R300.42 | length 28.4
  Top Layer w0.33: R300.42 41.398,23.677 v1(41.859,23.216) ; v1(46.787,19.837) 46.787,18.694 48.006,17.475 57.15,17.475 59.131,15.494 R112.1 R116.2
  Bottom Layer w0.33: v1(41.859,23.216) 41.859,20.676 42.672,19.863 46.761,19.863 v1(46.787,19.837)
NetR120_1: R120.1 R122.2 R300.40 | length 12.8
  Top Layer w0.33: R300.40 42.398,24.15 42.824,23.724 v1(42.824,23.216) ; v1(47.346,21.463) R120.1 R122.2
  Bottom Layer w0.33: v1(42.824,23.216) 42.824,21.631 43.018,21.438 47.32,21.438 v1(47.346,21.463)
NetR121_1: R121.1 R123.2 R300.43 | length 20.3
  Top Layer w0.33: v1@40.898,23.216 R300.43 ; v1(42.672,14.935) 47.701,14.935 48.387,15.621 R121.1 R123.2
  Bottom Layer w0.33: v1(40.894,23.216) 40.894,16.662 42.621,14.935 v1(42.672,14.935)
NetR204_2: R204.2 U200.9 | length 10
  Top Layer w0.33: v1(23.47,21.285) 23.52,21.336 R204.2 ; U200.9 25.193,26.674 v1(25.349,26.518)
  Bottom Layer w0.33: v1(23.47,21.285) 25.156,21.285 25.349,21.479 v1(25.349,26.518)
NetR300_15: R300.15 U400.6 | length 26.2
  Top Layer w0.305: v1(38.811,15.291) 38.85,15.33 38.957,15.33 39.398,15.771 R300.15 ; U400.6 v1(41.402,36.068)
  Bottom Layer w0.305: v1(38.811,15.291) 38.811,23.266 40.945,25.4 42.164,25.4 42.57,25.806 42.57,34.9 v1(41.402,36.068)
NetR300_16: R300.16 U400.2 | length 30.7
  Top Layer w0.305: v1(33.528,37.389) 33.535,37.389 33.586,37.338 U400.2 ; v1(39.878,14.072) 39.898,14.092 R300.16
  Bottom Layer w0.305: v1(33.528,37.389) 33.528,36.678 37.338,32.868 37.338,14.63 37.897,14.072 v1(39.878,14.072)
NetR300_17: R300.17 U400.5 | length 27.3
  Top Layer w0.305: U400.5 v1(41.504,34.798) ; R300.17 40.398,14.623 40.488,14.533 v1(40.488,14.478)
  Bottom Layer w0.305: v1(40.488,14.478) 40.433,14.478 40.179,14.732 38.228,14.732 38.049,14.911 38.049,23.876 41.504,27.33 v1(41.504,34.798)
NetR300_30: R300.30 U200.17 | length 36.4
  Top Layer w0.33: U200.17 25.693,31.128 25.949,31.385 46.39,31.385 v1(46.888,30.886) ; R300.30 46.676,20.451 46.718,20.409 47.257,20.409 v1(47.904,19.761)
  Bottom Layer w0.33: v1(46.888,30.886) 48.019,29.756 48.019,21.252 47.904,21.137 v1(47.904,19.761)
NetR300_31: R300.31 U200.18 | length 38.1
  Top Layer w0.33: U200.18 25.193,31.76 25.386,31.953 47.092,31.953 v1@47.142,31.902 ; R300.31 46.859,20.951 46.918,20.892 47.457,20.892 47.622,20.726 v1(48.476,20.726)
  Bottom Layer w0.33: v1@47.142,31.902 48.501,30.543 48.501,20.752 v1(48.476,20.726)
  other v1: 47.142,31.919
NetR300_44: R300.44 R301.2 | length 2.1
  Top Layer w0.33: R301.2 40.398,27.001 R300.44
NetR400_2: R400.2 U400.3 | length 2.9
  Top Layer w0.33: R400.2 32.664,36.767 32.664,36.261 32.858,36.068 U400.3
NetR402_1: R402.1 U400.7 | length 2.4
  Top Layer w0.33: U400.7 R402.1
NetU2_4: U2.4 U200.4 | length 15.7
  Top Layer w0.305: U2.4 15.177,37.338 v1(16.662,37.338) ; v1(17.678,29.566) 22.047,29.566 22.78,28.833 U200.4
  Bottom Layer w0.305: v1(16.662,37.338) 17.221,36.779 17.221,30.023 v1(17.678,29.566)
NetU2_6: U2.6 U200.5 | length 21.5
  Top Layer w0.33: v1(12.294,37.338) 13.271,37.338 U2.6 ; v1(16.408,27.889) 17.069,27.889 18.085,28.905 21.996,28.905 22.569,28.333 U200.5
  Bottom Layer w0.33: v1(12.294,37.338) 12.294,29.007 13.411,27.889 v1(16.408,27.889)
R1a: Q100.3 R109.2 | length 24.6
  Top Layer w0.33: R109.2 69.911,2.603 70.104,2.797 70.104,19.923 69.911,20.117 66.792,20.117 Q100.3
R2a: Q101.3 R117.2 | length 14.2
  Top Layer w0.33: Q101.3 57.582,26.035 60.198,28.651 64.821,28.651 65.075,28.905 R117.2
RST: J300.5 R300.7 | length 52
  Top Layer w0.33: J300.5 10.834,42.418 29.575,42.418 29.769,42.225 v1(29.769,40.996) ; v1(29.769,20.523) 29.841,20.451 R300.7
  Bottom Layer w0.33: v1(29.769,20.523) v1(29.769,40.996)
RXT: D201.2 U200.19 | length 6.7
  Top Layer w0.33: v1(23.978,34.646) 24.681,35.349 D201.2 ; v1(24.028,31.852) 24.062,31.818 24.381,31.818 24.693,31.506 U200.19
  Bottom Layer w0.33: v1(23.978,34.646) 24.003,34.62 24.003,31.877 v1(24.028,31.852)
SWCLK: J300.2 R300.37 | length 52.1
  Top Layer w0.33: v1(43.891,23.622) 43.898,23.629 R300.37
  Bottom Layer w0.33: J300.2 15.31,43.942 43.698,43.942 43.891,43.749 v1(43.891,23.622)
SWDIO: J300.4 R300.34 | length 62.3
  Top Layer w0.33: v1(40.132,22.454) 40.135,22.451 R300.34
  Bottom Layer w0.33: J300.4 12.021,43.231 43.037,43.231 43.231,43.037 43.231,25.349 42.621,24.74 41.199,24.74 40.132,23.673 v1(40.132,22.454)
TEMP_S: P301.2 R300.11 R302.1 | length 19.4
  Top Layer w0.33: P301.2 33.058,3.619 31.915,4.763 R302.1 31.915,10.325 35.458,13.868 35.458,17.723 36.186,18.451 R300.11
TXT: D200.2 U200.20 | length 12.8
  Top Layer w0.33: v1(22.962,31.75) 22.962,31.385 23.155,31.191 23.999,31.191 24.193,30.998 U200.20 ; v1(22.962,39.167) 22.962,40.497 23.358,40.894 D200.2
  Bottom Layer w0.33: v1(22.962,31.75) v1(22.962,39.167)
V_B: C6.1 D2.2 J1.1
V_IN: D1.1 D2.1 D3.1 FB1.1 | length 22.7
  Bottom Layer w0.762: v1(19.05,15.621) 19.05,17.526 19.939,18.415 21.082,18.415 21.666,18.999 v1(21.666,36.576)
V_JACK: C5.1 D1.2 J2.1
V_MCU: C302.1 C303.1 C304.1 C305.1 FB300.2 R300.1 R300.24 R300.48 | length 28.3
  Top Layer w0.33: 36.233,23.584 36.366,23.451 R300.1 38.335,23.451 38.354,23.47 38.398,23.514 ; 36.392,25.584 37.025,24.951 R300.48 38.398,23.514 ; C304.1@36.392,29.064 C304.1 ; R300.24 43.898,17.646 43.891,17.653 43.307,18.237 38.964,18.237 38.398,18.803 38.398,23.514
  Top Layer w0.635: C302.1 36.233,23.584
  Top Layer w0.762: FB300.2 C304.1 ; 36.392,25.584 C304.1@36.392,29.064
VBUS: C7.1 D3.2 J3.1 R200.2 U2.5 | length 23.9
  Top Layer w0.33: D3.2@18.377,35.014 D3.2
  Top Layer w0.762: J3.1 11.658,35.636 11.938,35.916 v1(14.224,35.916) ; U2.5 v1(14.224,35.916) ; v1(17.882,26.314) 17.882,26.304 17.907,26.279 R200.2 ; D3.2@18.377,35.014 C7.1 ; v1(18.491,32.868) 18.484,32.875 18.484,34.907 D3.2 17.551,34.925 16.561,35.916 v1(14.224,35.916)
  Bottom Layer w0.762: v1(17.882,26.314) 17.882,28.346 18.491,28.956 v1@18.491,32.857
VBUS_B: R200.1 R201.2 U200.8 | length 16.1
  Top Layer w0.305: R201.2 20.777,20.574
  Top Layer w0.33: R200.1 R200.1@18.056,22.634 ; 20.777,20.574 24.499,20.574 24.693,20.767 U200.8
  Top Layer w0.762: R201.2 R200.1
VDD_CP: C200.1 C201.1 C202.1 FB200.2 R204.1 U200.6 U200.7 | length 11.4
  Top Layer w0.635: FB200.2 15.532,26.232 15.538,26.226 15.538,25.197 15.646,25.089 v1(15.646,25.044)
  Top Layer w0.762: C202.1 C201.1 R204.1@23.52,24.79
  Bottom Layer w0.762: v1(15.646,25.044) 18.644,25.044 v1(19.914,26.314)
VDDA: C300.1 C301.1 FB301.2 R300.9 | length 9.1
  Top Layer w0.33: C301.1 34.036,18.644 34.843,19.451 R300.9
  Top Layer w0.762: FB301.2 C300.1 C301.1
pads on no net: J3.4 J300.1 R300.2 R300.3 R300.4 R300.5 R300.6 R300.13 R300.14 R300.18 R300.19 R300.20 R300.21 R300.22 R300.25 R300.26 R300.27 R300.28 R300.29 R300.35 R300.36 R300.45 R300.46 U1.4 U200.1 U200.2 U200.10 U200.11 U200.13 U200.14 U200.15 U200.16

## Polygon pours and split planes (outlines as drawn)
GND on Top Layer "GND_L01_P001" (solid, pour order 1): 0,-0.559 0,45.212 1.676,46.888 70.968,46.888 70.968,46.838 72.746,45.06 72.695,45.009 72.695,1.219 70.968,-0.508
GND on Bottom Layer "GND_L02_P002" (solid, pour order 2): 0,-0.559 0,45.212 1.676,46.888 70.968,46.888 70.968,46.838 72.695,45.11 72.644,45.06 72.644,1.067 71.069,-0.508

## Keep-outs
Keep-Out Layer:
  the board outline again, w0.254

## Other copper
Top Layer:
  region net VDD_CP: 22.149,28.296 22.454,27.991 24.282,27.991 24.333,27.94 24.333,24.181 24.282,24.13 21.082,24.13 20.93,24.282 20.93,25.603 20.726,25.806 19.609,25.806 19.406,26.01 19.406,26.721 19.558,26.873 20.777,26.873 20.98,27.076 20.98,28.296 21.184,28.499 21.946,28.499
  region net V_IN: 21.082,34.163 20.955,34.29 20.955,37.084 21.082,37.211 22.352,37.211 22.479,37.084 22.479,34.29 22.352,34.163
  region net V_IN: 12.7,18.415 13.97,18.415 14.097,18.288 14.097,16.383 14.224,16.256 20.828,16.256 20.955,16.129 20.955,14.859 20.828,14.732 12.7,14.732 12.573,14.859 12.573,18.288
  region net V_JACK: 15.621,9.017 14.478,9.017 14.224,9.271 14.224,12.827 14.605,13.208 15.875,13.208 16.002,13.335 16.002,14.224 15.875,14.351 12.827,14.351 12.573,14.097 12.573,3.683 12.827,3.429 15.621,3.429 15.875,3.683 15.875,8.763
  region net V_B: 3.683,22.225 13.843,22.225 14.224,21.844 14.224,20.447 13.843,20.066 11.811,20.066 11.557,20.32 6.858,20.32 6.604,20.066 6.604,19.304 6.35,19.05 3.683,19.05 3.429,19.304 3.429,21.971

## Silkscreen, mask and mechanical layers (free items; w line width, h text height)
Top Overlay:
  text "RST" at 7.214,44.145 h0.8 r270
  text "SWDIO" at 9.381,44.145 h0.8 r270
  text "GND" at 11.549,44.145 h0.8 r270
  text "SWCLK" at 13.716,44.145 h0.8 r270
  text "USB" at 2.184,26.213 h1
  text "V+" at 6.858,23.825 h1
  text "GND" at 6.401,11.582 h1
  text "JACK" at 1.067,10.77 h1
  text "GND" at 36.068,4.115 h1 r90
  text "3V3" at 46.685,4.115 h1 r90
  text "3V3" at 30.785,4.064 h1 r90
  text "GND" at 43.993,4.064 h1 r90
  text "LIGHT_S" at 49.211,3.962 h1 r90
  text "T_S" at 33.412,3.912 h1 r90
Bottom Overlay:
  drawing of 2147 lines, arcs and shapes, not listed
  text "Natalia R V" at 55.524,43.79 h1
  text "FrigCuin" at 69.19,43.535 h1.52
  text "Carlos S R" at 55.524,42.215 h1
  text "V 0.001" at 69.19,41.605 h1

## Text inside footprints (layer, text, board x,y; h text height)
D200: Top Overlay "+" at 28.702,41.529 h0.8 r180
D201: Top Overlay "+" at 28.651,37.262 h0.8 r180